# EAGLE board Veroboard for ckt designing (EAGLE 7.7.0)
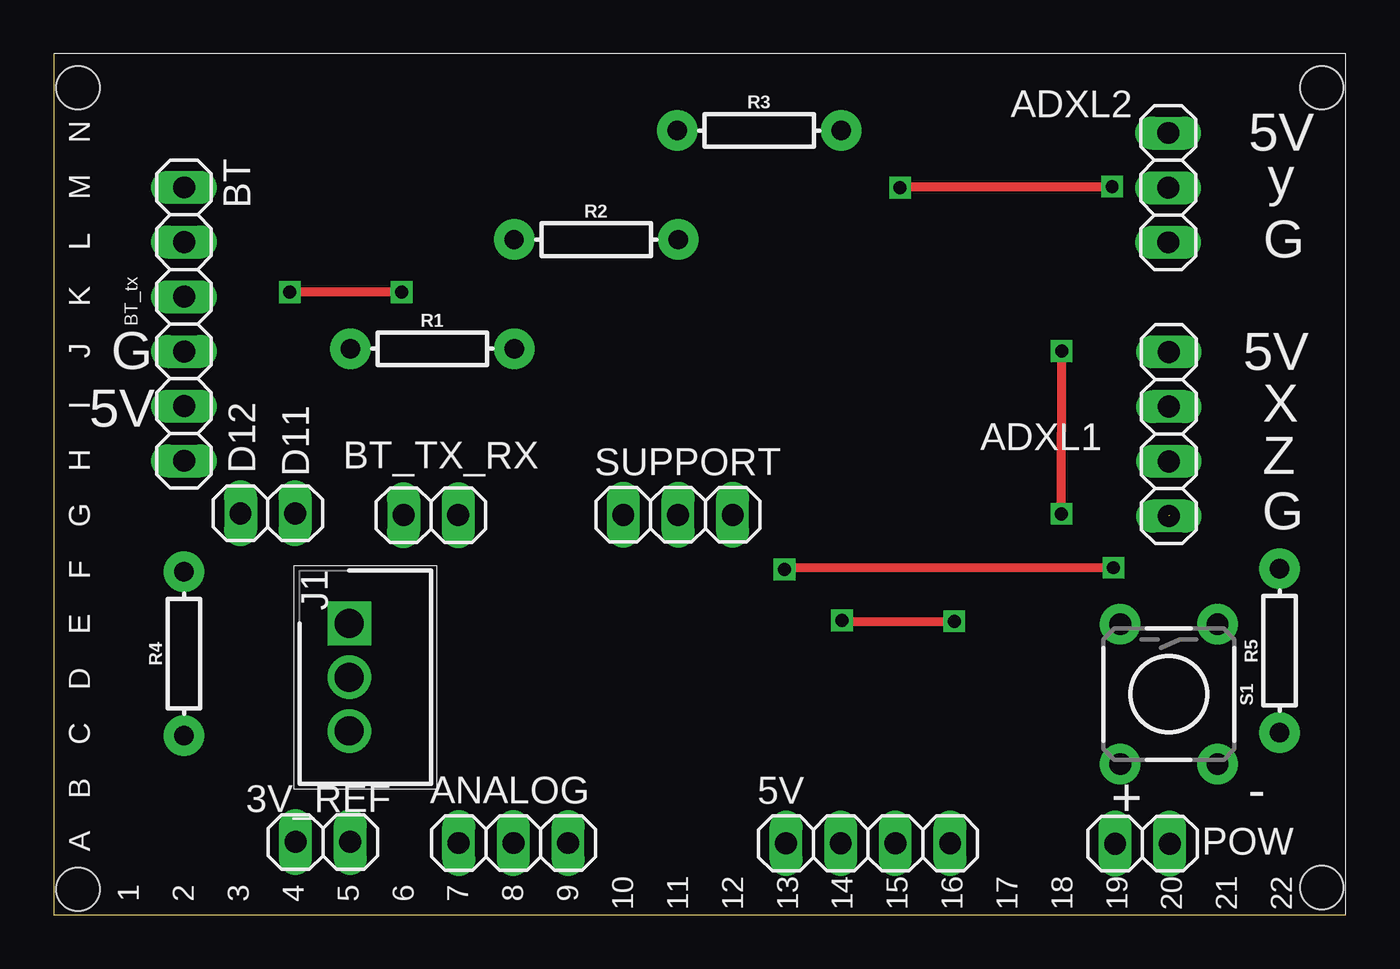
[diagram p0: board, top side]
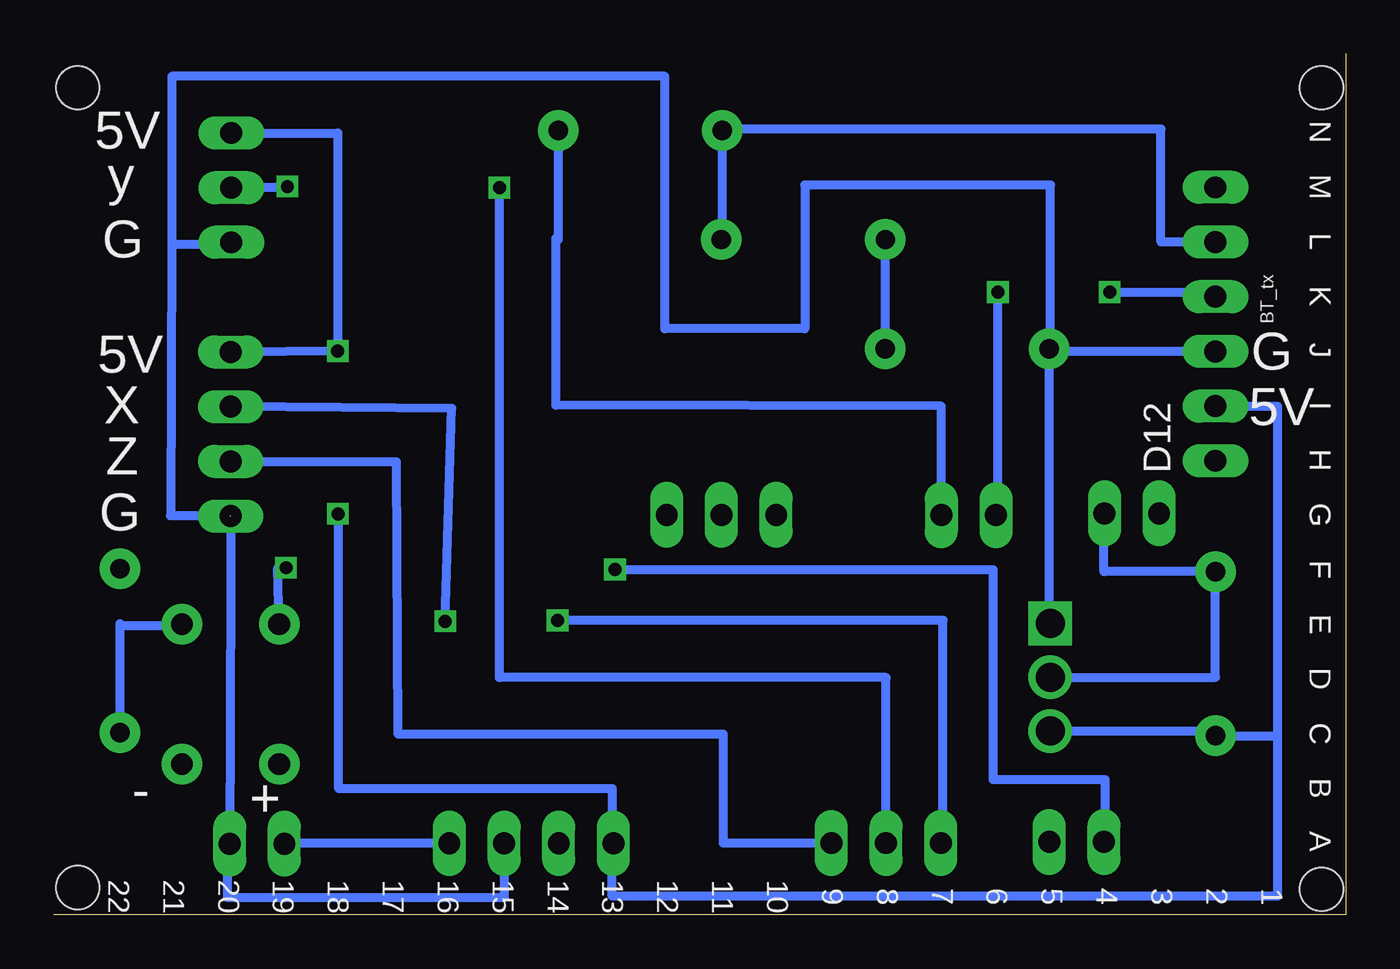
[diagram p1: board, bottom side, seen from below]

Size 60 x 40 mm. Coordinates in mm from the lower left corner, seen from the top.
Outline: 60,0 0,0 0,40
Copper layers (1*16): Top 0.035mm / dielectric 1.5mm / Bottom 0.035mm
Design rules "default": minimum track width 10mil, minimum drill 24mil, track to track 8mil, track to pad 8mil, pad to pad 8mil, via to via 8mil, smd to smd 8mil, copper to edge 40mil, drill to drill 8mil, minimum pad ring 10mil, minimum via ring 8mil, stop-mask expansion 4mil, vias tented up to drill 0mil, thermal gap 10mil
Holes 2 mm at 58.89,1.27 58.89,38.43 1.12,1.19 1.12,38.43

## Footprints (pad centres in the part's own frame; a part is rotated, then mirrored left to right if it is on the bottom)
1X02 = drill 1.016 long: 1 -1.27,0; 2 1.27,0
1X04 = drill 1.016 long: 1 -3.81,0; 2 -1.27,0; 3 1.27,0; 4 3.81,0
1X03 = drill 1.016 long: 1 -2.54,0; 2 0,0; 3 2.54,0
1X06 = drill 1.016 long: 1 -6.35,0; 2 -3.81,0; 3 -1.27,0; 4 1.27,0; 5 3.81,0; 6 6.35,0
SHDR3W80P0X250_1X3_990X610X700 = drill 1.35 pad 2.025 square: 1 0,0 | drill 1.35 pad 2.025: 2 2.5,0; 3 5,0
AXIAL-0.3 = drill 0.9 pad 1.88: P$1 -3.81,0; P$2 3.81,0
TACTILE_SWITCH_PTH_6.0MM = drill 1.016 pad 1.88: 1 -3.251,2.261; 2 3.251,2.261; 3 -3.251,-2.261; 4 3.251,-2.261

## Placement (x,y rotation side)
3V_REF  [1X02]  12.5,3.39 0 top
5V  [1X04]  37.82,3.32 0 top
ADXL1  [1X04]  51.79,22.34 90 top
ADXL2  [1X03]  51.76,33.78 270 top
ANALOG  [1X03]  21.35,3.34 0 top
BT  [1X06]  6.05,27.45 270 top
BT_TX_RX  [1X02]  17.51,18.57 180 top
D11  [1X02]  9.94,18.65 180 top
J1  S3B-XH-A(LF)(SN)  [SHDR3W80P0X250_1X3_990X610X700]  13.72,13.54 270 top
POW  [1X02]  50.56,3.31 0 top
R1  1k  [AXIAL-0.3]  17.58,26.3 0 top
R2  1k  [AXIAL-0.3]  25.19,31.37 0 top
R3  1k  [AXIAL-0.3]  32.76,36.44 0 top
R4  4.7k  [AXIAL-0.3]  6.05,12.14 90 top
R5  1k  [AXIAL-0.3]  56.93,12.27 90 top
S1  [TACTILE_SWITCH_PTH_6.0MM]  51.79,10.26 270 top
SUPPORT  [1X03]  28.99,18.58 0 top
U$1  [1X14]  3.54,19.86 90 top
U$2  [1X14]  6.08,19.86 90 top
U$3  [1X14]  8.62,19.86 90 top
U$4  [1X14]  11.16,19.86 90 top
U$5  [1X14]  13.7,19.86 90 top
U$6  [1X14]  16.24,19.86 90 top
U$7  [1X14]  18.78,19.86 90 top
U$8  [1X14]  21.32,19.86 90 top
U$9  [1X14]  23.86,19.86 90 top
U$10  [1X14]  26.4,19.86 90 top
U$11  [1X14]  28.94,19.86 90 top
U$12  [1X14]  31.48,19.86 90 top
U$13  [1X14]  34.02,19.86 90 top
U$14  [1X14]  36.56,19.86 90 top
U$15  [1X14]  39.1,19.86 90 top
U$16  [1X14]  41.64,19.86 90 top
U$17  [1X14]  44.18,19.86 90 top
U$18  [1X14]  46.72,19.86 90 top
U$19  [1X14]  49.26,19.86 90 top
U$20  [1X14]  51.8,19.86 90 top
U$21  [1X14]  54.34,19.86 90 top
U$22  [1X14]  56.88,19.86 90 top

## Library data of the parts
3V_REF 5V ADXL1 ADXL2 ANALOG BT BT_TX_RX D11 POW SUPPORT = pinhead
J1 = SamacSys_Parts; DESCRIPTION: XH-2.5mm Header side entry 3 way JST XH Series, Series Number S3B, 2.5mm Pitch 3 Way 1 Row Right Angle PCB Header, Solder Termination, 3A; HEIGHT: 7mm; MANUFACTURER_NAME: JST (JAPAN SOLDERLESS TERMINALS); MANUFACTURER_PART_NUMBER: S3B-XH-A(LF)(SN); RS_PART_NUMBER: 8201585; SUPPLIER_NAME: RS
R1-R5 = SparkFun-Resistors; PROD_ID: RES-12182
S1 = SparkFun-Switches; PROD_ID: SWCH-08441; SF_SKU: COM-00097
U$1-U$22 = pinhead_1x14_no_frame MOD

## Nets
3V: 3V_REF.1 S1.3
5V: 5V.1 ADXL1.4 ADXL2.1 BT.5 J1.3 R4.P$1
BT_TX: BT.3 BT_TX_RX.2
G: 5V.3 ADXL1.1 ADXL2.3 BT.4 J1.1 POW.2 R1.P$1
N$1: R1.P$2 R2.P$1
N$2: BT.2 R2.P$2 R3.P$1
N$3: R5.P$1 S1.1
RX: BT_TX_RX.1 R3.P$2
TS: D11.1 J1.2 R4.P$2
VIN: 5V.4 POW.1
X: ADXL1.3 ANALOG.1
Y: ADXL2.2 ANALOG.2
Z: ADXL1.2 ANALOG.3

## Tracks (layer width: path | path; a pad name or v marks a point on that pad's centre or on a via)
3V  (via drill 0.6)
  Top 0.406: v49.22,16.13 33.93,16.13 v33.93,16.05
  Bottom 0.406: 3V_REF.1 11.17,3.39 11.17,6.28 16.36,6.28 16.36,16.05 v33.93,16.05 | S1.3 49.6,16.13 v49.22,16.13
5V  (via drill 0.6)
  Top 0.406: v46.8,18.63 46.82,26.24 v46.81,26.19
  Bottom 0.406: BT.5 3.17,23.64 3.17,8.33 | 3.17,8.33 3.17,0.87 34.07,0.87 34.07,3.32 | 3.17,8.33 R4.P$1 6.05,8.54 J1.3 | v46.8,18.63 46.77,18.63 46.77,5.86 34.07,5.86 34.07,3.32 | v46.81,26.19 46.64,26.19 ADXL1.4 | 46.58,26.19 v46.81,26.19 | 34.07,3.32 5V.1 | 46.58,26.22 v46.81,26.19 | ADXL2.1 46.82,36.32 v46.81,26.19
BT_TX  (via drill 0.6)
  Top 0.406: v16.15,28.93 v10.96,28.93
  Bottom 0.406: BT_TX_RX.2 16.15,18.57 v16.15,28.93 | v10.96,28.93 6.05,28.93 BT.3
G  (1 unrouted)
  Bottom 0.406: BT.4 13.77,26.18 R1.P$1 | R1.P$1 13.71,26.3 13.71,33.91 25.12,33.91 25.12,27.23 31.62,27.23 31.62,38.95 54.52,38.95 54.52,31.13 | 54.52,31.13 54.57,18.55 51.84,18.55 | J1.1 13.77,13.54 R1.P$1 | ADXL1.1 51.79,18.61 51.81,6.06 51.83,6.06 POW.2 51.93,3.31 51.93,0.8 39.09,0.8 5V.3 | ADXL2.3 51.76,31.13 54.52,31.13
N$1
  Bottom 0.406: R2.P$1 21.39,31.37 R1.P$2
N$2
  Bottom 0.406: 28.95,36.48 R3.P$1 | R2.P$2 28.95,31.37 R3.P$1 | BT.2 8.59,31.25 8.59,36.5 28.95,36.5 R3.P$1
N$3
  Bottom 0.406: 56.93,13.53 56.93,13.42 | 56.93,13.42 R5.P$1 | S1.1 54.12,13.42 56.93,13.42
RX
  Bottom 0.406: 36.67,31.42 36.68,31.44 | R3.P$2 36.57,31.38 36.61,31.39 36.68,31.44 | BT_TX_RX.1 18.78,23.63 36.68,23.68 36.68,31.44
TS
  Bottom 0.406: J1.2 6.05,11.04 R4.P$2 11.22,15.95 D11.1
VIN
  Bottom 0.406: 5V.4 49.29,3.33 POW.1
X  (via drill 0.6)
  Top 0.406: v36.6,13.68 36.6,13.64 v41.82,13.64
  Bottom 0.406: ANALOG.1 18.7,3.34 18.7,13.68 v36.6,13.68 | v41.82,13.64 41.52,23.52 ADXL1.3
Y  (via drill 0.6)
  Top 0.406: v39.31,33.78 39.31,33.84 v49.15,33.84
  Bottom 0.406: ANALOG.2 21.35,11.03 39.31,11.03 v39.31,33.78 | v49.15,33.84 49.15,33.78 ADXL2.2
Z
  Bottom 0.406: ANALOG.3 28.9,3.34 28.9,8.4 44,8.4 44.09,21.05 51.83,21.05 ADXL1.2

## Text on the board
tNames: N | 5V | M | y | L | G | K | BT_tx | J | G | 5V | I | D12 | 5V | X | H | Z | G | G | F | E | D | C | B | + | - | A | 1 / 2 / 3 / 4 / 5 / 6 / 7 / 8 / 9 / 10 / 11 / 12 / 13 / 14 / 15 / 16 / 17 / 18 / 19 / 20 / 21 / 22
bNames: N | 5V | M | y | L | G | K | BT_tx | J | G | 5V | I | D12 | 5V | X | H | Z | G | G | F | E | D | C | B | + | - | A | 1 / 2 / 3 / 4 / 5 / 6 / 7 / 8 / 9 / 10 / 11 / 12 / 13 / 14 / 15 / 16 / 17 / 18 / 19 / 20 / 21 / 22